# EAGLE board Jacdaptor_FeatherWing-RevB (EAGLE 9.6.2)
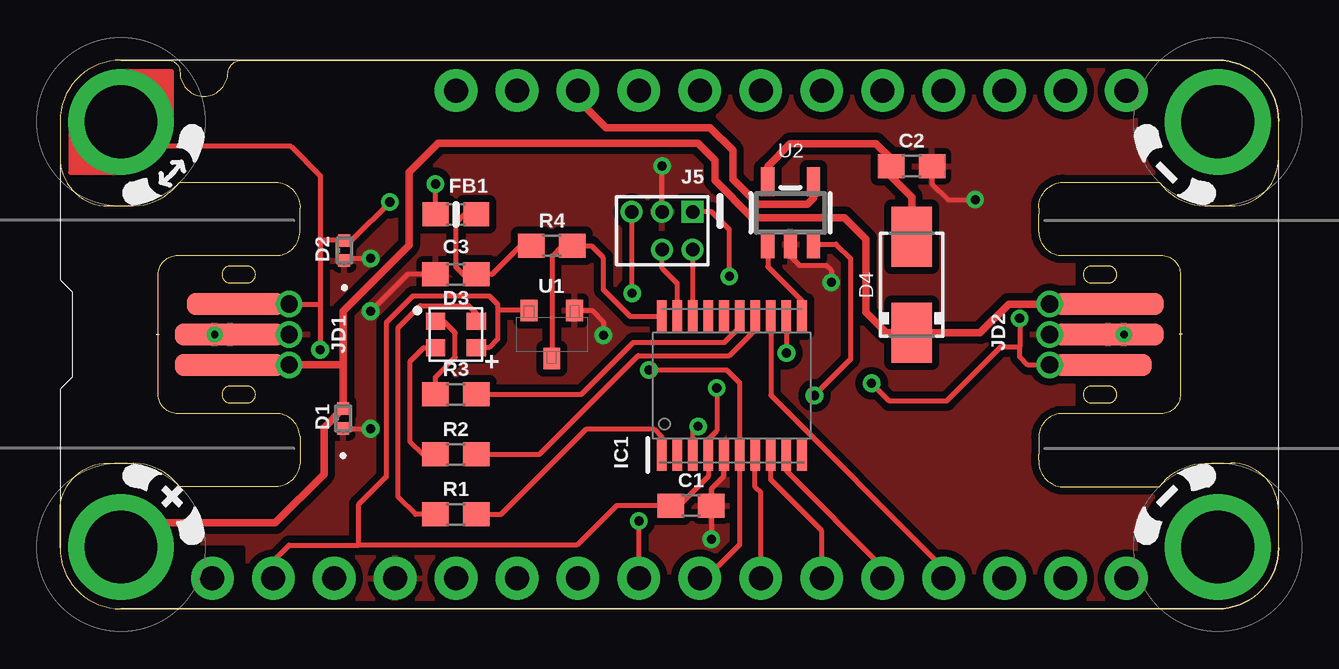
[diagram p0: board, top side]
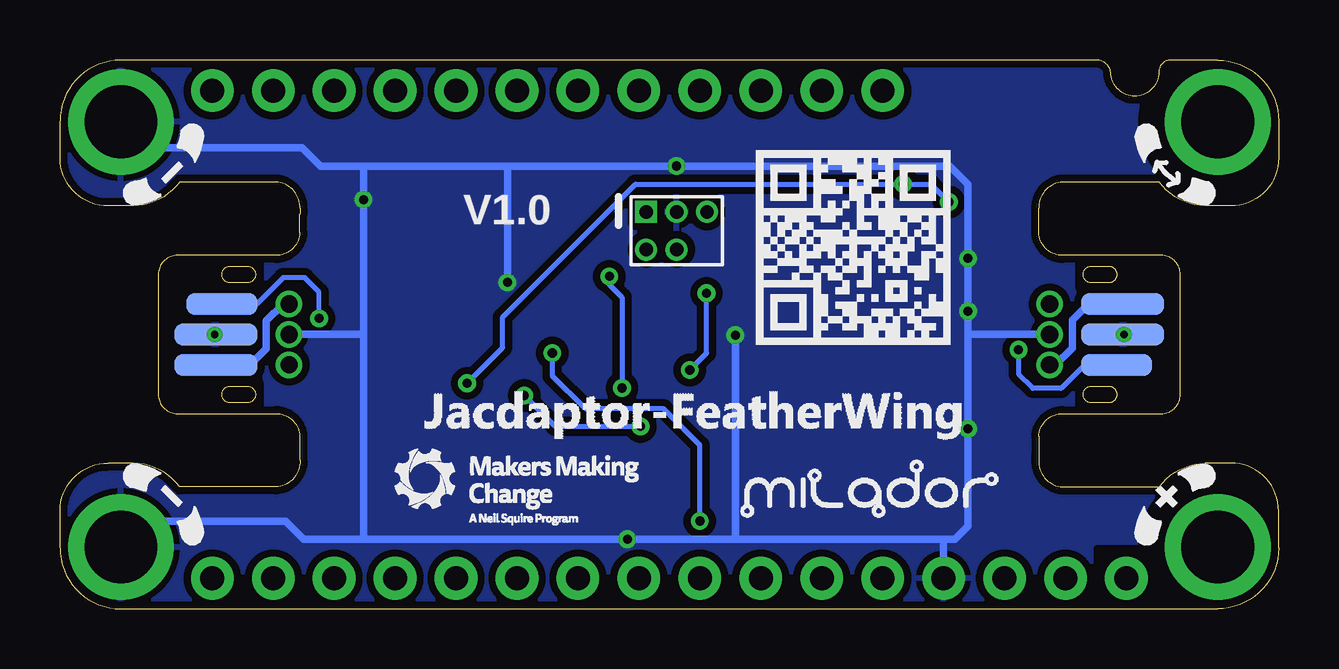
[diagram p1: board, bottom side, seen from below]

Size 50.8 x 22.87 mm. Coordinates in mm from the lower left corner, seen from the top.
Outline: 10,16.43 10,16.68 arc90 9,17.78 4.98,17.78 arc-52 3.08,16.79 2,16.79 arc-90 0,18.79 0,20.32 arc-90 2.54,22.86 4.5,22.86 arc-90 5,22.36 arc90 6,21.36 arc90 7,22.36 arc-90 7.69,22.86 48.26,22.86 arc-90 50.8,20.32 50.8,18.79 arc-90 48.8,16.79 47.72,16.79 arc-52 45.82,17.78 41.8,17.78 arc90 40.8,16.68 40.8,16.43
Outline: 10,6.43 10,6.18 arc-90 9,5.08 4.98,5.08 arc52 3.08,6.07 2,6.07 arc90 0,4.07 0,2.54 arc90 2.54,0 48.26,0 arc90 50.8,2.54 50.8,4.07 arc90 48.8,6.07 47.72,6.07 arc52 45.82,5.08 41.8,5.08 arc-90 40.8,6.18 40.8,6.43
Copper layers (1*16): Top 0.035mm / dielectric 1.5mm / Bottom 0.035mm
Design rules "SparkFun-2-layer-TIGHT *": minimum track width 7mil, minimum drill 15mil, track to track 1mil, track to pad 1mil, pad to pad 1mil, via to via 1mil, smd to smd 1mil, copper to edge 1mil, drill to drill 1mil, minimum pad ring 7mil, minimum via ring 7mil, stop-mask expansion 4mil, vias tented up to drill 25mil, thermal gap 10mil

## Footprints (pad centres in the part's own frame; a part is rotated, then mirrored left to right if it is on the bottom)
0603 = smd 1.1 x 1: 1 -0.85,0; 2 0.85,0
DIODE-ZENER-0402 = smd 0.508 x 0.508: 1 -0.419,0; 2 0.419,0
LED-RGB-2121 = smd 0.8 x 0.7: B- 0.85,0.55; G- -0.85,-0.55; PLUS 0.85,-0.55; R- -0.85,0.55
DO214AC = smd 2.5 x 1.7: A 2,0; C -2,0
0603-NO = smd 1.075 x 1: 1 -0.85,0; 2 0.85,0
SOP65P640X120-20N = smd 0.4 x 1.35: 1 -2.925,-2.875; 2 -2.275,-2.875; 3 -1.625,-2.875; 4 -0.975,-2.875; 5 -0.325,-2.875; 6 0.325,-2.875; 7 0.975,-2.875; 8 1.625,-2.875; 9 2.275,-2.875; 10 2.925,-2.875; 11 2.925,2.875; 12 2.275,2.875; 13 1.625,2.875; 14 0.975,2.875; 15 0.325,2.875; 16 -0.325,2.875; 17 -0.975,2.875; 18 -1.625,2.875; 19 -2.275,2.875; 20 -2.925,2.875
M3-HOLE-DATA = drill 3.03 pad 4.4: H 0,0
M3-HOLE-PWR = drill 3.03 pad 4.4: H 0,0
M3-HOLE-GND = drill 3.03 pad 4.4: H 0,0
SWD-ADAPTER = drill 0.559 pad 0.864 square: 1 0,0 | drill 0.559 pad 0.864: 2 0,1.575; 3 1.27,0; 4 1.27,1.575; 5 2.54,0
JD-EDGE-INNIE = smd 0.9 x 4.1: 1 1.27,-3.25 | smd 0.9 x 4.6: 2 0,-3; 3 -1.27,-3 | smd 0.9 x 3.45 bottom: 4 1.27,-2.4; 5 0,-2.4 | smd 0.9 x 2.95 bottom: 6 -1.27,-2.65 | drill 0.71 pad 1.1: P$1 -1.27,-5.45; P$2 0,-5.45; P$3 1.27,-5.45 | drill 0.305 pad 0.559: P$4 0,-2.35
ADAFRUIT_FEATHERWING_DIM = drill 1 pad 1.778: 1 6.35,1.27; 2 8.89,1.27; 3 11.43,1.27; 4 13.97,1.27; 5 16.51,1.27; 6 19.05,1.27; 7 21.59,1.27; 8 24.13,1.27; 9 26.67,1.27; 10 29.21,1.27; 11 31.75,1.27; 12 34.29,1.27; 13 36.83,1.27; 14 39.37,1.27; 15 41.91,1.27; 16 44.45,1.27; 17 44.45,21.59; 18 41.91,21.59; 19 39.37,21.59; 20 36.83,21.59; 21 34.29,21.59; 22 31.75,21.59; 23 29.21,21.59; 24 26.67,21.59; 25 24.13,21.59; 26 21.59,21.59; 27 19.05,21.59; 28 16.51,21.59
SOT23-3 = smd 0.9 x 0.7: 1 1,-0.95; 2 1,0.95; 3 -1,0
SOT23-5 = smd 0.55 x 1.2: 1 -0.95,-1.3; 2 0,-1.3; 3 0.95,-1.3; 4 0.95,1.3; 5 -0.95,1.3

## Placement (x,y rotation side)
C1  4.7uF  [0603]  26.3,4.3 0 top
C2  4.7uF  [0603]  35.5,18.45 0 top
C3  33pF  [0603]  16.5,13.93 180 top
D1  RCLAMP0521PATCT  [DIODE-ZENER-0402]  11.8,7.93 90 top
D2  RCLAMP0521PATCT  [DIODE-ZENER-0402]  11.85,14.93 90 top
D3  FM-B2020RGBA  [LED-RGB-2121]  16.5,11.43 0 top
D4  C2480  [DO214AC]  35.5,13.5 90 top
FB1  800mA 1kR  [0603-NO]  16.5,16.43 180 top
IC1  STM32G030F8P6  [SOP65P640X120-20N]  28,9.3 0 top
J1  [M3-HOLE-DATA]  2.54,20.29 0 top
J2  [M3-HOLE-PWR]  2.54,2.57 0 top
J3  [M3-HOLE-GND]  48.26,2.57 0 top
J4  [M3-HOLE-GND]  48.26,20.29 90 top
J5  SWD-ADAPTER-  [SWD-ADAPTER]  26.37,16.54 180 top
JD1  JACDAC-EDGE-INNIE  [JD-EDGE-INNIE]  4.1,11.43 90 top
JD2  JACDAC-EDGE-INNIE  [JD-EDGE-INNIE]  46.7,11.43 270 top
LABEL_DEVICE  MILADOR-JACDAC-DEVICE-JACDAPTOR-WING  [JACDAPTOR-FEATHERWING]  24.5,8.2 0 bottom
LABEL_LOGO  MILADOR-LOGO-SM  [MILADOR_LOGO2]  17.75,4.5 0 bottom
LABEL_MMC  MMC_LOGO-XSM  [MMC_X-SMALL_LOGO]  31.85,3.5 0 bottom
LABEL_QR_CODE  MILADOR-QR-CODE-JACDAC-FEATHERWING  [MILADOR_QR_JACDAC_FEATHERWING]  17.75,11 0 bottom
MS1  ADAFRUIT_FEATHERWING_NODIM  [ADAFRUIT_FEATHERWING_DIM]  0,0 0 top
R1  470  [0603]  16.5,3.93 0 top
R2  220  [0603]  16.5,6.43 0 top
R3  150  [0603]  16.5,8.93 0 top
R4  220  [0603]  20.5,15.12 0 top
U1  BAT54S,235-23-3  [SOT23-3]  20.5,11.43 90 top
U2  APL3511D  [SOT23-5]  30.45,16.5 0 top

## Library data of the parts
C1-C3 D3 D4 FB1 IC1 R1-R4 U1 U2 = milador_SMD
D1 D2 = milador_SMD; COPYRIGHT: Copyright (C) 2021 Ultra Librarian. All rights reserved.; DIGI-KEY_PART_NUMBER_1: RCLAMP0521PACT-ND; DIGI-KEY_PART_NUMBER_2: RCLAMP0521PADKR-ND; DIGI-KEY_PART_NUMBER_3: RCLAMP0521PATR-ND; MANUFACTURER_PART_NUMBER: RCLAMP0521PATCT; MFR_NAME: Semtech
J1-J5 JD1 JD2 LABEL_DEVICE LABEL_LOGO LABEL_QR_CODE MS1 = milador
LABEL_MMC = MMC Eagle

## Nets
+3V3: C1.1 D3.PLUS IC1.4 J5.1 MS1.2 U1.2
CS: IC1.10
FAULT: IC1.11 U2.1
GND: C1.2 C2.2 C3.2 D1.1 D2.1 IC1.5 J3.H J4.H J5.3 JD1.2 JD1.5 JD1.P$2 JD1.P$4 JD2.2 JD2.5 JD2.P$2 JD2.P$4 MS1.4 U1.1 U2.2
JD: IC1.20 R4.2 U1.3
JD5V: D1.2 D4.C J2.H JD1.3 JD1.4 JD1.P$1 JD2.3 JD2.4 JD2.P$1
JDF: D2.2 FB1.2 J1.H JD1.1 JD1.6 JD1.P$3 JD2.1 JD2.6 JD2.P$3
LED_B: IC1.1 R1.2
LED_G: IC1.14 R2.2
LED_R: IC1.15 R3.2
LIM: IC1.3 U2.3
MISO: IC1.13 MS1.13
MOSI: IC1.9 MS1.12
N$1: D3.B- R1.1
N$2: D3.G- R2.1
N$3: D3.R- R3.1
N$4: C3.1 FB1.1 R4.1
OUT: C2.1 D4.A U2.5
RESET: IC1.6 J5.5 MS1.9
RX_RD: IC1.12 MS1.8
SCK: IC1.8 MS1.11
SCL: IC1.16
SDA: IC1.17
SWCLK: IC1.19 J5.4
SWDIO: IC1.18 J5.2
TX_RD: IC1.7 MS1.10
VUSB: MS1.26 U2.4

## Tracks (layer width: path | path; a pad name or v marks a point on that pad's centre or on a via)
+3V3  (via drill 0.38)
  Top 0.2: v27.38,9.2 27.38,7.42 27.02,7.08 IC1.4 27.02,5.53 25.8,4.3 C1.1 23.2,4.3 21.55,2.65 12.45,2.65 | v27.9,13.85 27.9,15.8 27.16,16.54 J5.1 | MS1.2 8.89,1.99 9.55,2.65 12.45,2.65 | 12.45,2.65 12.45,4.35 13.6,5.5 13.6,11.92 14.72,13.03 17.89,13.03 18.24,12.69 18.24,12.45 | 18.24,12.45 18.24,11.25 17.88,10.88 D3.PLUS | U1.2 18.26,12.43 18.24,12.45
  Bottom 0.2: v27.38,9.2 27.38,12.97 27.9,13.5 v27.9,13.85
FAULT
  Top 0.2: U2.1 29.5,14.26 30.93,12.84 IC1.11
GND  (via drill 0.38)
  Top 0.178: JD2.P$2 JD2.2 JD2.P$4 | JD1.P$4 JD1.2 JD1.P$2
  Top 0.2: J5.3 v25.1,18.45 | D2.1 11.94,14.6 v12.95,14.6 | C3.2 14.48,13.93 v12.95,12.4 | v27.15,2.9 C1.2 27.15,5 27.68,5.53 IC1.5 | D1.1 v12.94,7.51 v12.95,7.5 | C2.2 36.35,17.7 37,17.05 v38.15,17.05 | v22.65,11.4 22.65,11.95 22.17,12.43 U1.1 | U2.2 30.45,14.7 30.85,14.3 31.95,14.3 32.15,14.1 v32.15,13.6 | IC1.5 27.68,6.83 27.58,6.93 27.58,6.52 IC1.5
  Bottom 0.305: 38.15,18.45 39.94,18.45 40.71,19.22 47.21,19.22 J4.H | 38.15,18.45 32.15,18.45 | 32.15,18.45 v25.1,18.45 13.7,18.45 12.95,17.7 v12.95,14.6 v12.95,12.4 12.95,11.43 | JD1.P$2 12.95,11.43 | MS1.4 13.97,2.9 | 13.97,2.9 13.5,2.9 12.95,3.45 v12.95,7.5 12.95,11.43 | 38.15,2.9 v27.15,2.9 22.6,2.9 | 22.6,2.9 13.97,2.9 | 38.15,2.9 38.15,11.45 | 38.15,11.45 v38.15,17.05 38.15,18.45 | JD2.P$2 38.17,11.43 38.15,11.45 | v22.65,11.4 22.65,2.95 22.6,2.9 | v32.15,13.6 32.15,18.45 | J3.H 47.18,3.65 41.4,3.65 40.65,2.9 38.15,2.9
  pour Bottom (isolate 0.305): 50.8,22.86 50.8,0 0,0 0,22.86
  pour Top (isolate 0.305): 50.8,22.86 50.8,0 0,0 0,22.86
  cutout Top: 5.08,2.54 7.62,2.54 7.62,0 5.08,0
  cutout Bottom: 5.08,2.54 7.62,2.54 7.62,0 5.08,0
JD
  Top 0.2: U1.3 20.5,14.7 20.92,15.12 R4.2 22.15,15.12 22.65,14.62 22.65,13.3 23.77,12.18 IC1.20
JD5V
  Top 0.178: JD1.3 JD1.P$1 | JD1.3 6.77,10.16 6.52,10.41 6.85,10.41 JD1.3 | JD2.3 JD2.P$1
  Top 0.305: JD2.P$1 39.55,12.7 38.35,11.5 D4.C 34.45,11.5 33.6,12.35 33.6,15.4 32.7,16.3 28.85,16.3 27.3,17.85 27.3,18.7 26.6,19.4 15.75,19.4 14.55,18.2 14.55,15.15 11.8,12.4 11.8,10.16 | 11.8,10.16 D1.2 11,7.55 11,5.61 8.97,3.58 3.55,3.58 J2.H | JD1.P$1 11.8,10.16
  Bottom 0.305: JD1.P$1 9.3,10.16 8.6,10.86 8.6,12.03 7.93,12.7 JD1.4 | JD2.P$1 41.5,12.7 42.2,12 42.2,10.83 42.87,10.16 JD2.4
JDF  (via drill 0.38)
  Top 0.2: JD2.P$3 JD2.1 JD2.P$3 | JD2.P$3 40.35,10.15 40,10.5 40,10.9 | JD1.1 JD1.P$3 10.85,12.7 | 10.85,12.7 v10.85,10.79 | 10.85,15.35 10.85,12.7 | J1.H 3.54,19.27 9.63,19.27 10.85,18.05 10.85,15.35 | 10.85,15.35 D2.2 12.15,15.35 v13.75,16.95 | v40,12.1 40,10.9 | v33.83,9.4 34.58,8.65 36.95,8.65 39.2,10.9 40,10.9 | FB1.2 v15.65,17.7
  Bottom 0.2: v10.85,10.79 10.85,9.78 10.25,9.18 9.07,9.18 8.09,10.16 JD1.6 | v40,12.1 40,13.2 40.6,13.8 41.5,13.8 42.6,12.7 JD2.6 | v33.83,9.4 32.35,10.88 32.35,12.15 26.8,17.7 v15.65,17.7 14.5,17.7 v13.75,16.95
LED_B
  Top 0.2: R1.2 18.38,3.93 21.95,7.5 24.75,7.5 25.07,7.17 IC1.1
LED_G
  Top 0.2: R2.2 19.98,6.43 24.1,10.55 27.9,10.55 28.9,11.55 28.98,11.62 IC1.14
LED_R
  Top 0.2: R3.2 21.73,8.93 23.9,11.1 27.7,11.1 28.32,11.72 IC1.15
LIM  (via drill 0.38)
  Top 0.2: U2.3 32.35,15.2 32.95,14.6 32.95,10.39 v31.45,8.89 | v26.6,7.6 26.38,7.38 IC1.3
  Bottom 0.2: v31.45,8.89 30.16,7.6 v26.6,7.6
MISO
  Top 0.2: MS1.13 36.83,1.7 29.62,8.9 IC1.13
MOSI
  Top 0.2: MS1.12 34.29,1.74 30.27,5.75 IC1.9
N$1
  Top 0.2: R1.1 14.82,3.93 14.1,4.65 14.1,11.72 15.02,12.63 17.04,12.63 17.35,12.32 D3.B-
N$2
  Top 0.2: R2.1 15.12,6.43 14.6,6.95 14.6,10.32 15.16,10.88 D3.G-
N$3
  Top 0.2: R3.1 15.65,9.65 16.47,10.48 16.47,11.5 15.99,11.98 D3.R-
N$4
  Top 0.2: R4.1 19.2,15.12 18.01,13.93 C3.1 16.8,13.93 16.5,14.23 16.5,16.08 16.85,16.43 FB1.1
OUT
  Top 0.305: U2.5 29.5,18.45 30.43,19.38 34.02,19.38 34.65,18.75 C2.1 34.65,18.01 35.5,17.16 D4.A
RESET  (via drill 0.38)
  Top 0.2: v23.85,13.15 23.85,16.52 J5.5 | v24.55,9.95 27.8,9.95 28.32,9.43 IC1.6 28.32,2.67 26.92,1.27 MS1.9
  Bottom 0.2: v24.55,9.95 23.85,10.65 v23.85,13.15
RX_RD  (via drill 0.38)
  Top 0.2: MS1.8 v24.13,3.66 | IC1.12 v30.27,10.66 v30.28,10.66
  Bottom 0.2: v24.13,3.66 24.13,6.82 25.64,8.33 28.89,8.33 30.28,9.72 v30.28,10.66
SCK
  Top 0.2: MS1.11 31.75,3.25 29.62,5.38 IC1.8
SWCLK
  Top 0.2: J5.4 25.1,14.2 25.73,13.57 IC1.19
SWDIO
  Top 0.2: IC1.18 J5.2
TX_RD
  Top 0.2: MS1.10 29.21,4.84 28.98,5.08 IC1.7
VUSB
  Top 0.305: MS1.26 21.59,21.21 22.75,20.05 27.1,20.05 28.05,19.1 28.05,17.9 29.1,16.85 31.15,16.85 31.4,17.1 U2.4

## Text on the board
bPlace: V1.0